# Altium PCB BM Dev Cells.PcbDoc
Units mil, origin at the board's own origin, x right, y up, seen from the top; angles counter-clockwise.
Board outline 3719.4 x 3489.61 mil, 2 copper layers (TOP Copper, BOT Copper), stack 60.8 mil thick; 26 components, 10 nets, 69 pads, 6 vias.
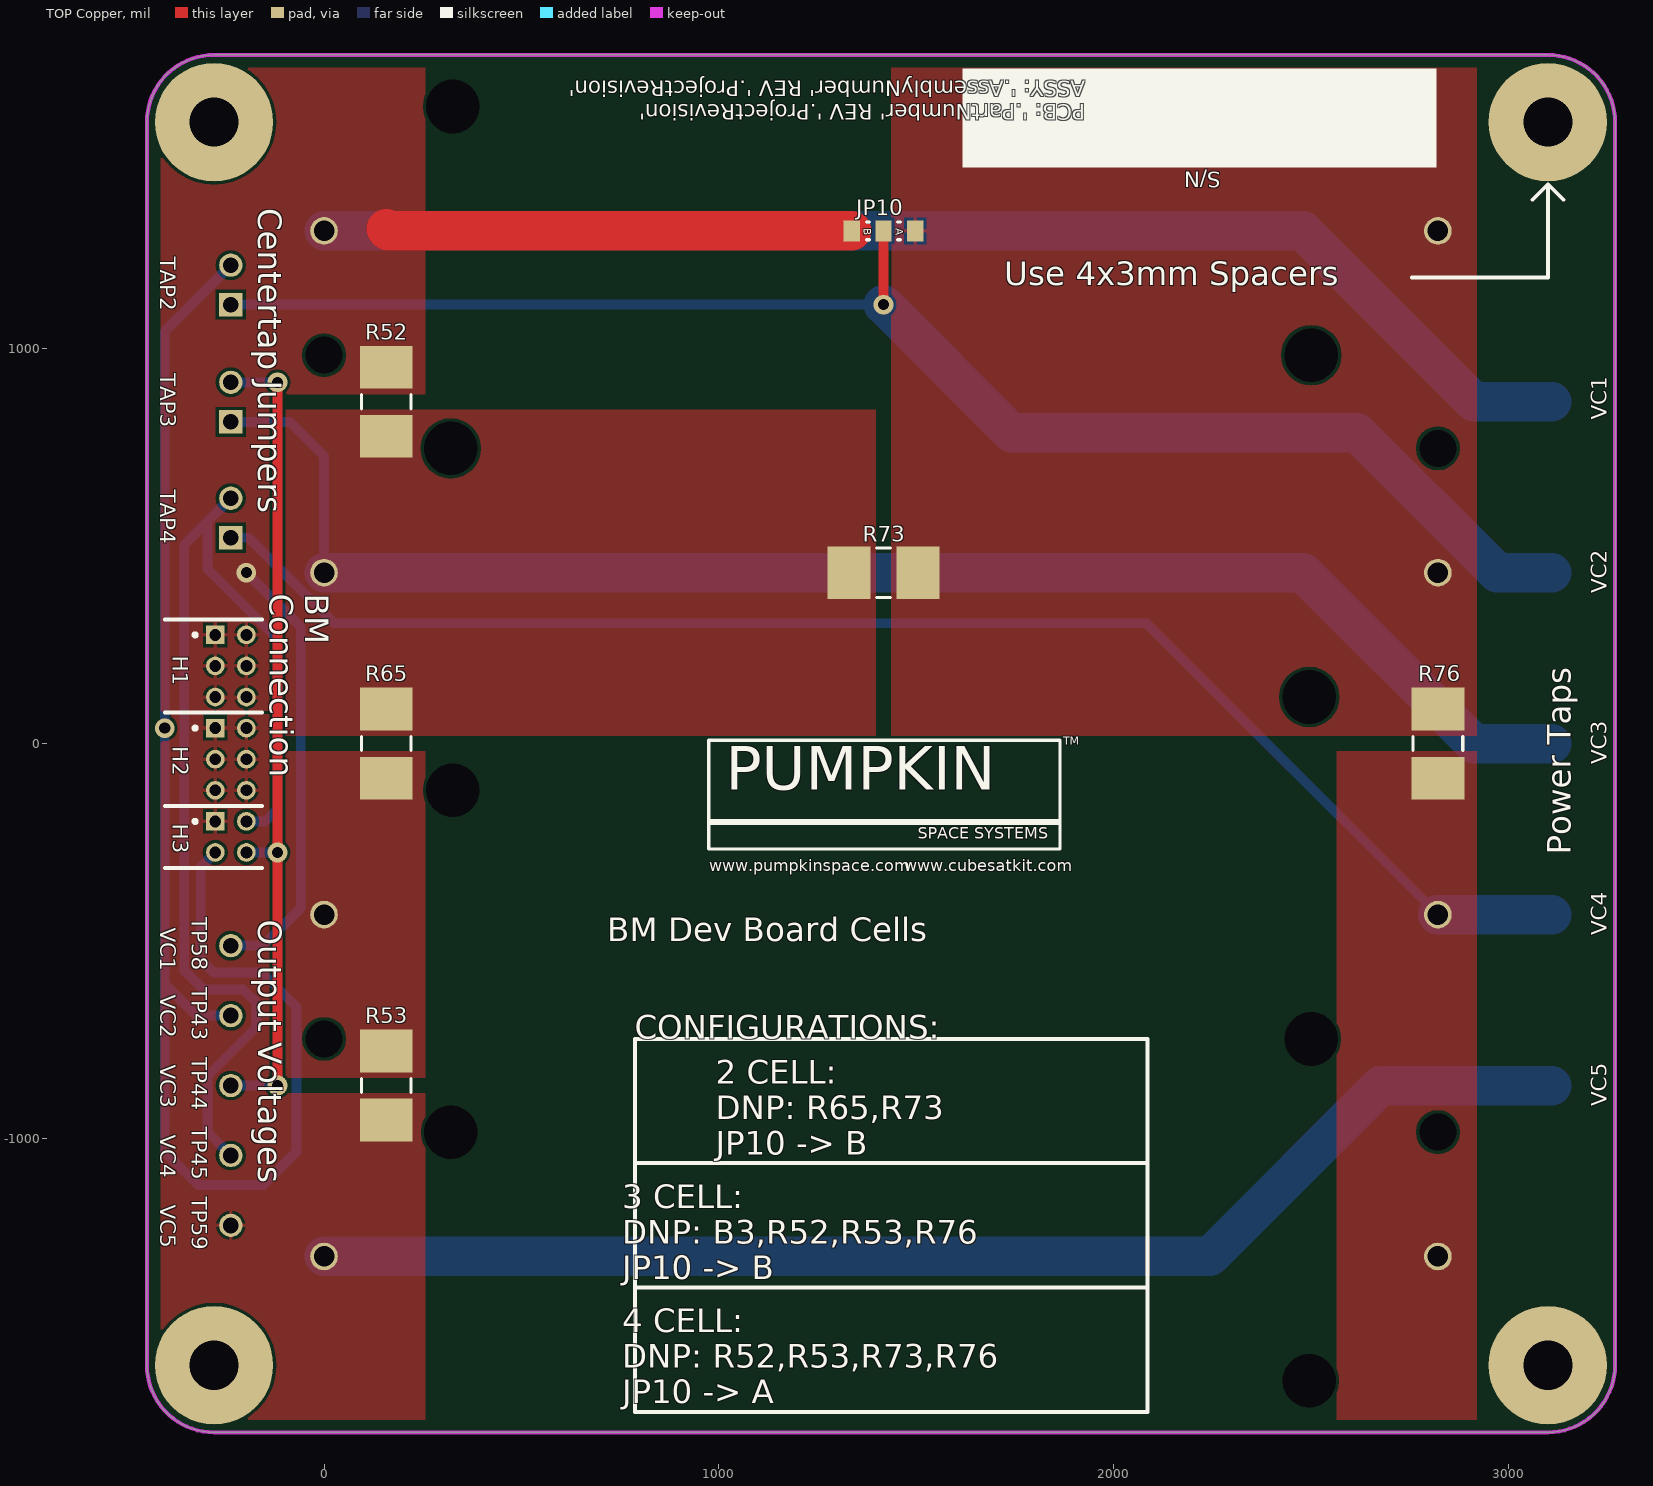
[diagram p0: TOP Copper view]
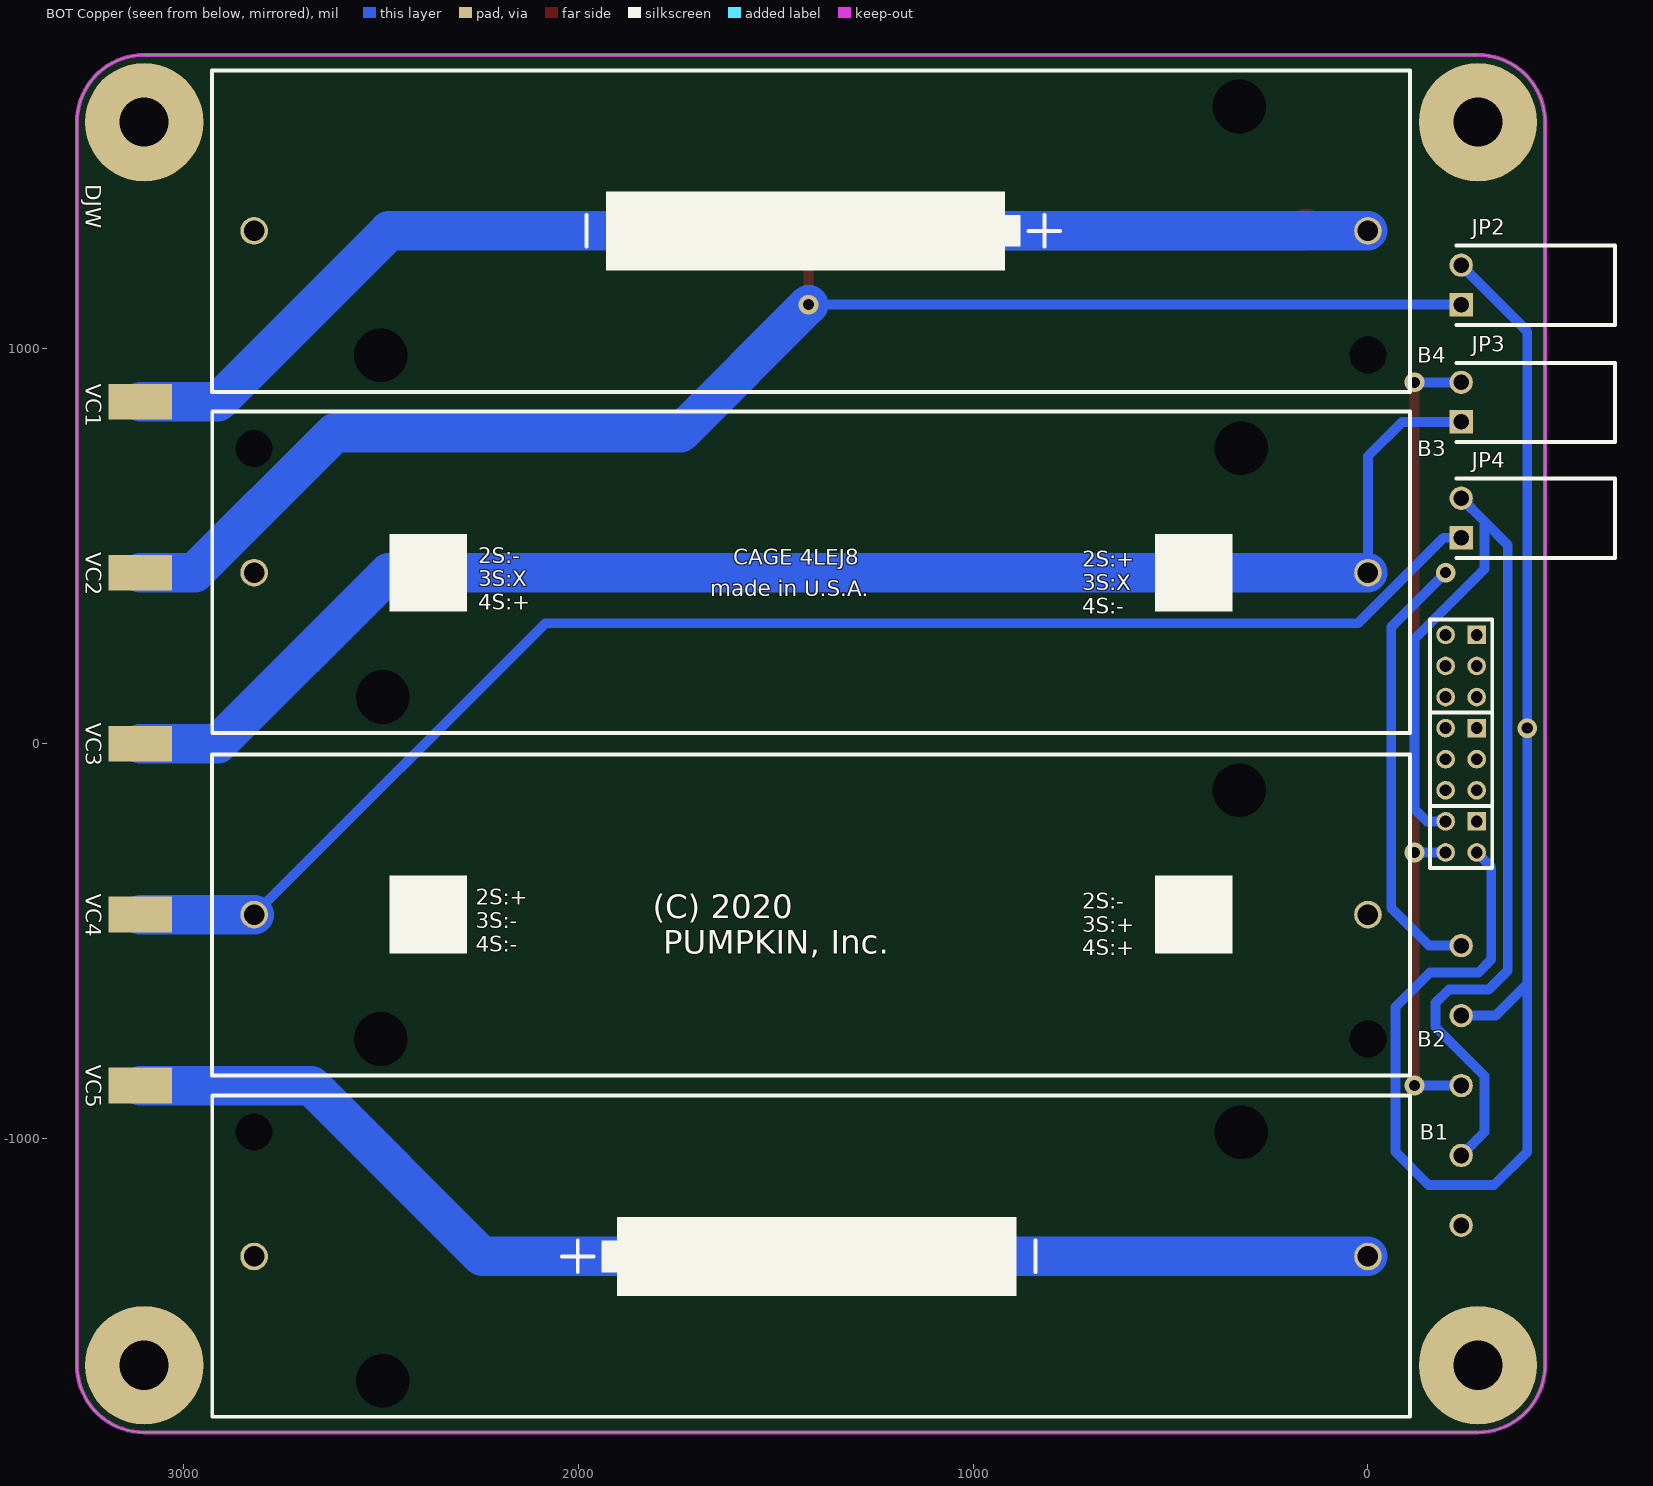
[diagram p1: BOT Copper view, seen from below]
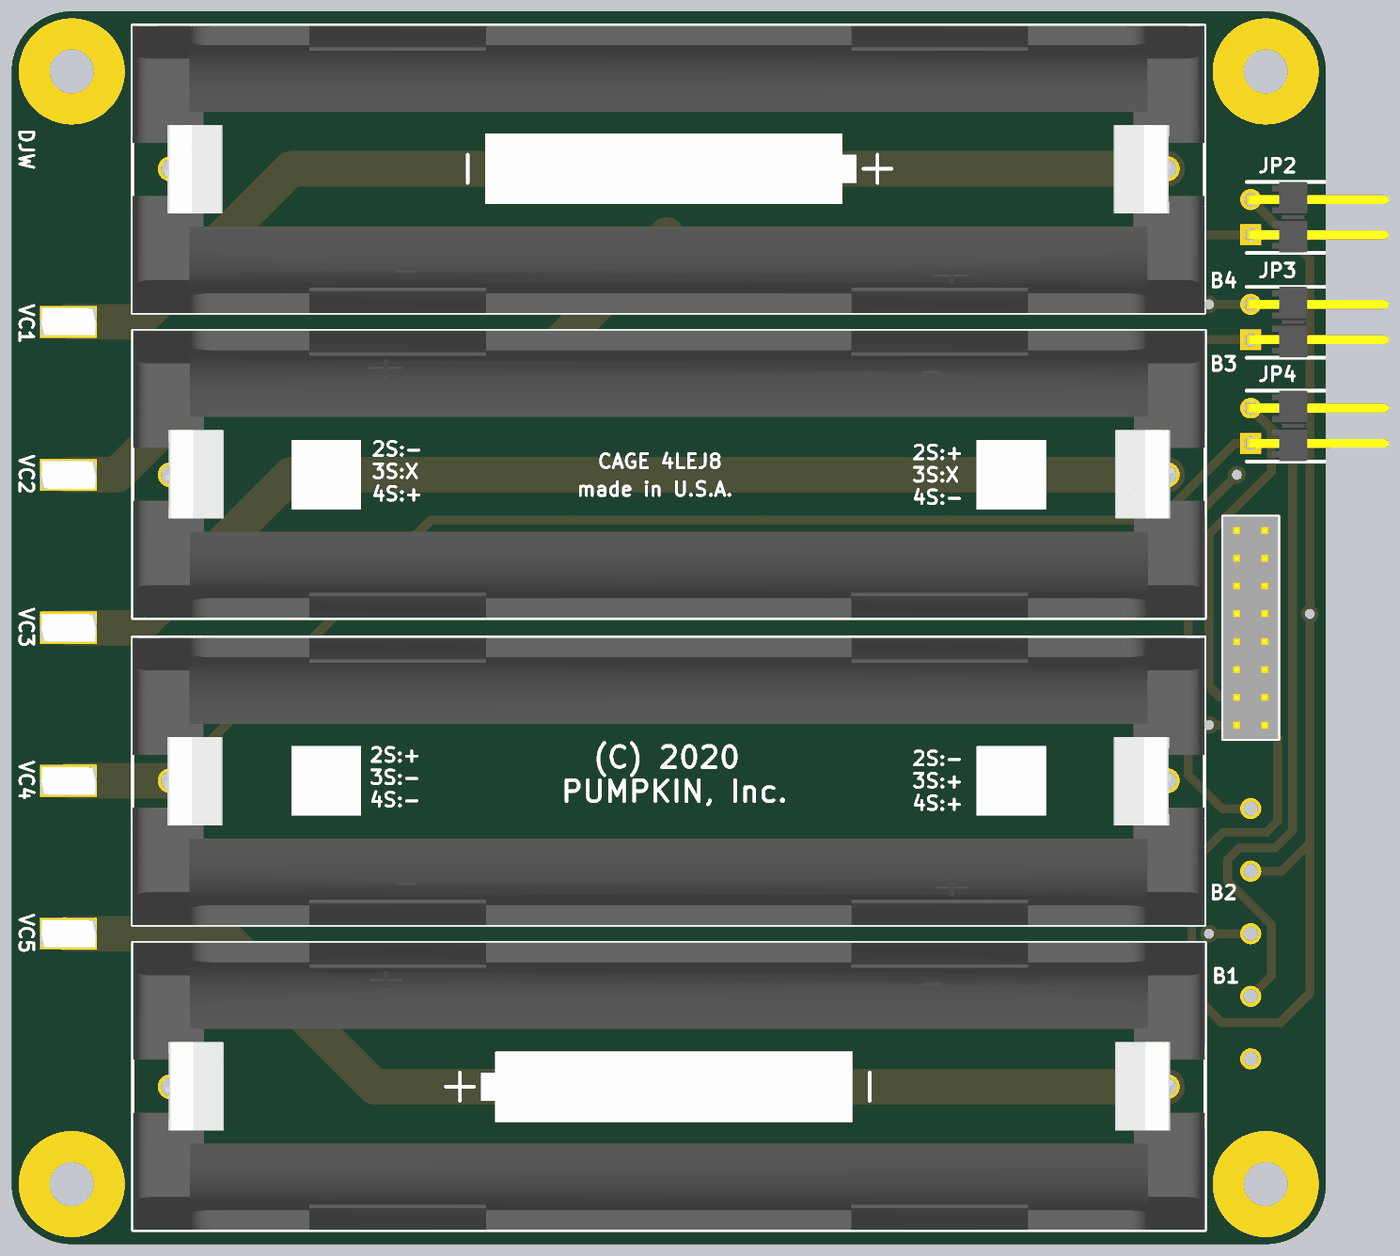
[diagram p2: 3D render of the assembled board from below, using the file's embedded part models]

## Layer stack, top to bottom
Top Solder: solder mask 0.4, Solder Resist, Dk 3.5
TOP Copper: signal copper 1.4
Dielectric 3: prepreg 58, Dk 4.2
BOT Copper: signal copper 1.4
Bottom Solder: solder mask 0.4, Solder Resist, Dk 3.5

## Board outline
-448.7,-1574.8 -448.7,1574.8 cw(c-278.7,1574.8) -278.7,1744.8 3100.7,1744.8 cw(c3100.7,1574.8) 3270.7,1574.8 3270.7,-1574.8 cw(c3100.7,-1574.8) 3100.7,-1744.8 -278.7,-1744.8 cw(c-278.7,-1574.8)

## Design rules (kind name [scope] priority, off if disabled: settings)
Clearance Clearance_1 [HasFootprint('Spark_Gap') vs inPolygon] p1: gap=8 ignorepadtopadclearanceinfootprint=FALSE except(0: Arc-Hole Track-Hole SMDPad-Hole THPad-Hole Via-Hole Fill-Hole Poly-Hole Region-Hole Text-Hole)
Clearance Clearance_3 [HasFootprint('Spark_Gap')] p2: gap=6 ignorepadtopadclearanceinfootprint=FALSE except(0: Arc-Hole Track-Hole SMDPad-Hole THPad-Hole Via-Hole Fill-Hole Poly-Hole Region-Hole Text-Hole)
Clearance Clearance_2 [InNet('BAT_POS')   and not      HasFootprint('Spark_Gap')] p3: gap=8 ignorepadtopadclearanceinfootprint=FALSE except(0: Arc-Hole Track-Hole SMDPad-Hole THPad-Hole Via-Hole Fill-Hole Poly-Hole Region-Hole Text-Hole)
Clearance Polygon_Clearence [All vs OnLayer('Keep-Out Layer')] p4: gap=10 ignorepadtopadclearanceinfootprint=FALSE except(0: Arc-Hole Track-Hole SMDPad-Hole THPad-Hole Via-Hole Fill-Hole Poly-Hole Region-Hole Text-Hole)
Clearance [All] p5: gap=8 ignorepadtopadclearanceinfootprint=FALSE except(0: Arc-Hole Track-Hole SMDPad-Hole THPad-Hole Via-Hole Fill-Hole Poly-Hole Region-Hole Text-Hole)
ComponentClearance ComponentClearance_MTMM [HasFootprint('MTMM-103-03-S-D-243') vs HasFootprint('MTMM-102-02-S-D-196')] p1: gap=0 collisioncheckmode=3 verticalgap=10 showdistances=FALSE
ComponentClearance [All] p2: gap=10 collisioncheckmode=3 verticalgap=1.97 showdistances=FALSE
HoleSize [All] p1: absolutevalues=TRUE maxlimit=314.96 minlimit=1 maxpercent=80.000 minpercent=20.000
MinimumSolderMaskSliver [All] p1: minsoldermaskwidth=6
PolygonConnect PolygonConnect_1 [(InPadClass('Power'))or isVia   or HasFootprint('Spark_Gap')] p1: connectstyle=Direct reliefconductorwidth=10 reliefentries=4 polygonreliefangle="90 Angle" airgapwidth=10
PolygonConnect [All] p2: connectstyle=Relief reliefconductorwidth=10 reliefentries=4 polygonreliefangle="90 Angle" airgapwidth=7.09
RoutingVias [All] p1: holewidth=7.87 width=19.68 viastyle="Through Hole" minholewidth=5 minwidth=15.75 maxholewidth=236.22 maxwidth=314.96
SilkToSilkClearance [All] p1: silktosilkclearance=0
SilkToSolderMaskClearance [IsPad] p1: minsilkscreentomaskgap=0 clearancetoexposedcopper=TRUE
SolderMaskExpansion [All] p1: expansion=0 istentingtop=FALSE
Width [All] p1: maxlimit=100 minlimit=8 preferedwidth=10 minimp=50.000000 maximp=50.000000 favimp=50.000000
25 further rules are at their usual default settings.

## Components (designator, comment, footprint, x,y, rotation, side; value= is the part's Value field where it differs from the comment)
B1 "1043" 1043 2822,-1299.21 r270 bottom
B2 "1043" "1043 - non-polar" 0,-433.07 r90 bottom
B3 "1043" "1043 - non-polar" 2822,433.07 r270 bottom
B4 "1043" 1043 0,1299.21 r90 bottom
H1 "MTMM-103-03-S-D-243" MTMM-103-03-S-D-243 -236.22,196.85 r0 top
H2 "MTMM-103-03-S-D-243" MTMM-103-03-S-D-243 -236.22,-39.37 r0 top
H3 "MTMM-102-02-S-D-196" MTMM-102-02-S-D-196 -236.22,-236.22 r0 top
JP2 "TSW-102-08-L-S-RA" HDR1X2HTH -236.22,1112.2 r90 bottom
JP3 "TSW-102-08-L-S-RA" HDR1X2HTH -236.22,815.35 r90 bottom
JP4 "TSW-102-08-L-S-RA" HDR1X2HTH -236.22,521.65 r90 bottom
JP10 "Jumper" "0805 RES 2 way jumper" 1457.68,1299.21 r180 top
R52 "0R" "2512 RES" 157.48,866.14 r270 top
R53 "0R" "2512 RES" 157.48,-866.14 r90 top
R65 "0R" "2512 RES" 157.48,0 r90 top
R73 "0R" "2512 RES" 1417.32,433.07 r180 top
R76 "0R" "2512 RES" 2822,0 r90 top
TP43 "Testpoint" Testpoint -236.22,-688.98 r90 top
TP44 "Testpoint" Testpoint -236.22,-866.14 r90 top
TP45 "Testpoint" Testpoint -236.22,-1043.31 r90 top
TP58 "Testpoint" Testpoint -236.22,-511.81 r90 top
TP59 "Testpoint" Testpoint -236.22,-1220.47 r90 top
VC1 "Hook" Hook 3110.24,866.14 r344 bottom
VC2 "Hook" Hook 3110.24,433.07 r344 bottom
VC3 "Hook" Hook 3110.24,0 r344 bottom
VC4 "Hook" Hook 3110.24,-433.07 r344 bottom
VC5 "Hook" Hook 3110.24,-866.14 r344 bottom

## Footprints (in the part's own frame and the unit in brackets; to place one, negate y for a bottom-side part, rotate by r counter-clockwise, add the part's x,y. Pads: shape width x height; smd on the part's side, far side on the other; paste and mask are expansions set on the pad)
"0805 RES 2 way jumper" [mm] "Chip Resistor, 2-Leads, Body 2.05x1.25mm, IPC Medium Density"
  rect 1.05x1.35 smd: 1(-1.025,0) 2(1.025,0) 3(3.075,0)
  silkscreen extent -0.07,-0.58 2.13,0.58
1043 [mil]
  round 70 hole 52: 1(0,0) 2(0,2822)
  round 39.37 hole 94 unplated: NC(-315,0)
  round 39.37 hole 136 unplated: NC(-315,2501) NC(315,326)
  silkscreen extent -408,-106 406,2929, body extent -408,-105 405,2929, height 587
"1043 - non-polar" [mil]
  round 70 hole 52: 1(0,0) 2(0,2822)
  round 39.37 hole 94: NC(-315,0)
  round 39.37 hole 136: NC(-315,2501) NC(315,326)
  silkscreen extent -408,-106 406,2929, body extent -408,-105 405,2929, height 587
"2512 RES" [mm] "Chip Resistor, 2-Leads, Body 6.30x3.20mm, IPC Medium Density"
  rect 2.75x3.4 smd paste-2: 1(-2.225,0) 2(2.225,0)
  silkscreen extent -0.45,-1.6 0.45,1.6, body extent -3.25,-1.7 3.25,1.7, height 0.8
HDR1X2HTH [mm] "Connector; Header; 3 Position; Right Angle. Through hole"
  rect 1.5x1.5 hole 1: 1(0,0)
  round 1.5 hole 1: 2(2.54,0)
  silkscreen extent -1.3,-9.9 3.8,0.3, body extent -1.27,-9.91 3.81,0.32, height 3.07
Hook [mm]
  rect 4.1x2.3 smd rot 164 paste-0.3: 1(0,0)
  body extent -2.24,-1.52 2.25,1.53, height 2.3
MTMM-102-02-S-D-196 [mm]
  rect 1.2x1.2 hole 0.762: 1(-1,1)
  round 1.2 hole 0.762: 2(1,1) 3(-1,-1) 4(1,-1)
  silkscreen extent -2.4,0.9 -2.2,1.1, body extent -1.97,-2 1.97,2, height 1.55
MTMM-103-03-S-D-243 [mm]
  rect 1.2x1.2 hole 0.762: 1(-1,2)
  round 1.2 hole 0.762: 2(1,2) 3(-1,0) 4(1,0) 5(-1,-2) 6(1,-2)
  silkscreen extent -2.4,1.9 -2.2,2.1, body extent -1.97,-3 1.97,3, height 1.55
Testpoint [mm]
  round 1.5 hole 1.02: 1(0,0)

## Part data
B1 B2 B3 B4: "Battery 18650 Holder", Supplier Part Number 1=36-1043-ND, Supplier 1=Digi-Key, Supplier 2=Mouser, Supplier Part Number 2=534-1043
H1 H2: "Header 3x2 TH thru-board 2mm", Supplier Part Number 1=MTMM-103-03-G-D-243-ND, Supplier 1=Digi-Key, Supplier 2=Digi-Key, Supplier Part Number 2=MTMM-103-03-G-D-000-ND, System=Connector
H3: "Header 2x2 TH thru-board 2mm", Supplier Part Number 1=MTMM-102-02-S-D-196-ND, Supplier 1=Digi-Key, Supplier 2=Digi-Key, Supplier Part Number 2=MTMM-102-02-G-D-196-ND, System=Connector
JP2 JP3 JP4: "Header 2x1 RA TH", Supplier Part Number 1=SAM1043-02-ND, Supplier 1=Digi-Key, Supplier 2=Digi-Key, Supplier 3=Digi-Key, Supplier 4=Digi-Key, Supplier Part Number 2=SAM10325-ND, Supplier Part Number 3=HTSW-102-08-G-S-RA-ND, Supplier Part Number 4=SAM1039-02-ND
JP10: library part "Jumper 2 way 0805", "Jumper 0805 2 pos", Supplier Part Number 1=P0.0ACT-ND, Supplier 1=Digi-Key, Supplier 2=Digi-Key, Supplier Part Number 2=311-0.0CRCT-ND
R52 R53 R65 R73 R76: library part "Resistor 0R 2512", "Resistor 0R 2512 1W", Supplier Part Number 1=YAG1232CT-ND, Revision="Altium ETH 11-03.2008", Supplier 1=Digi-Key, Supplier 2=Digi-Key, Supplier 3=Digi-Key, Supplier Part Number 2=RMCF2512ZT0R00CT-ND, Supplier Part Number 3=1276-6000-1-ND
TP43 TP44 TP45 TP58 TP59: Supplier Part Number 1=36-5002-ND, Supplier 1=Digi-Key, Supplier 2=Digi-Key, Supplier Part Number 2=36-5001-ND
VC1 VC2 VC3 VC4 VC5: "Testpoint Hook", Manufacturer="Keystone Electronics", Manufacturer Part Number=5016, Supplier Part Number 1=36-5016CT-ND, Supplier 1=Digi-Key, Supplier 1 Pricing="0.60 (NZD)", Supplier 2=Digi-Key, Supplier Part Number 2=36-5018CT-ND

## Free pads (board coordinates)
  round 300 hole 125: ""(-278.7,-1574.8) ""(-278.7,1574.8) ""(3100.7,-1574.8) ""(3100.7,1574.8)

## Via types
v1: diameter 50, hole 28, TOP Copper to BOT Copper, tented both sides, 6 vias

## Nets (pads, with @x,y where several pads share a name; then routed paths per layer and width w, separated by ;. In a path a pad name is that pad's centre, name@x,y a point inside that pad or via, vN(x,y) a via of type N, cw(c..) or ccw(c..) an arc to the next point about the centre after c; other vN are vias at no path point)
CELL_TAP_2: JP2.1 JP10.2 VC2.1 | length 3814.8
  TOP Copper w25: v1(1417.32,1112.2) JP10.2
  BOT Copper w25: JP2.1 v1(1417.32,1112.2)
  BOT Copper w100: v1(1417.32,1112.2) 1742.13,787.4 2618.11,787.4 2972.44,433.07 VC2.1
CELL_TAP_3: B3.2 JP3.1 R52.2 R65.2 R73.2 VC3.1 | length 3857.2
  BOT Copper w25: JP3.1 -87.01,815.35 0,728.35 B3.2
  BOT Copper w100: B3.2 2480.32,433.07 2913.39,0 VC3.1
CELL_TAP_4: B1.1 B2.2 JP4.1 R76.1 VC4.1 | length 3741.9
  BOT Copper w25: JP4.1 -190.94,521.65 25.59,305.12 2083.81,305.12 B2.2
  BOT Copper w100: B2.2 VC4.1
NetB2_1: B2.1 R53.2 R65.1
NetB3_1: B3.1 B4.2 JP10.1 R73.1 R76.2
VC1: B4.1 H1.1 H1.2 H1.3 H1.4 H1.5 H1.6 JP10.3 R52.1 TP58.1 VC1.1 | length 5594.2
  TOP Copper w100: 157.48,1304.21 162.48,1299.21 JP10.3
  BOT Copper w25: TP58.1 -154.28,-511.81 -59.06,-416.59 -59.06,295.28 v1(-196.85,433.07)
  BOT Copper w100: B4.1 2480.32,1299.21 2913.39,866.14 VC1.1
VC5: B1.2 H2.1 H2.2 H2.3 H2.4 H2.5 H2.6 H3.1 R53.1 TP59.1 VC5.1 | length 3289.6
  BOT Copper w100: B1.2 2244.09,-1299.21 2677.17,-866.14 VC5.1
VC_2: H3.3 JP2.2 TP43.1 | length 3866.3
  BOT Copper w25: H3.3 -312.47,-312.47 -312.47,-546.97 -280.12,-579.33 -156.89,-579.33 -69.33,-666.89 -69.33,-1033.9 -153.54,-1118.11 -319.53,-1118.11 -403.54,-1034.1 -403.54,-609.23 ; TP43.1 -323.8,-688.98 -403.54,-609.23 ; JP2.2 -403.54,1044.88 v1(-403.54,39.37) -403.54,-609.23
VC_3: H3.4 JP3.2 TP44.1 | length 2096.5
  TOP Copper w25: v1(-118.11,-866.14) v1(-118.11,-275.59) v1(-118.11,915.35)
  BOT Copper w25: TP44.1 v1(-118.11,-866.14) ; JP3.2 v1(-118.11,915.35) ; H3.4 v1(-118.11,-275.59)
VC_4: H3.2 JP4.2 TP45.1 | length 2817.6
  BOT Copper w25: TP45.1 -295.28,-984.25 -295.28,-841.96 -171.53,-718.22 -171.53,-656.3 -205.1,-622.73 -306.04,-622.73 -354.33,-574.43 -354.33,503.54 -295.28,562.6 ; JP4.2 -295.28,562.6 ; H3.2 -149.61,-196.85 -118.11,-165.35 -118.11,264.98 -295.28,442.15 -295.28,562.6
pads on no net: B1.NC B2.NC B3.NC B4.NC

## Polygon pours and split planes (outlines as drawn)
VC1 on TOP Copper "TOP_COPPER_VC1_P006" (solid, pour order 6): 255.91,885.83 255.91,1712.6 -413.39,1712.6 -413.39,82.37 -137.8,82.37 -137.8,885.83
VC5 on TOP Copper "TOP_COPPER_VC5_P005" (solid, pour order 5): 255.91,-885.83 255.91,-1712.6 -413.39,-1712.6 -413.39,74.8 -137.8,74.8 -137.8,-885.83
CELL_TAP_4 on TOP Copper "TOP_COPPER_CELL_TAP_4_P003" (solid, pour order 3): 2920.43,-1712.6 2566.09,-1712.6 2566.09,-19.69 2920.43,-19.69
NetB3_1 on TOP Copper "TOP_COPPER_NETB3_1_P002" (solid, pour order 2): 2920.43,19.68 1437.01,19.68 1437.01,1712.6 2920.43,1712.6
CELL_TAP_3 on TOP Copper "TOP_COPPER_CELL_TAP_3_P001" (solid, pour order 1): -98.43,846.46 1397.64,846.46 1397.64,19.69 -98.43,19.69
NetB2_1 on TOP Copper "TOP_COPPER_NETB2_1_P000" (solid, pour order 0): -98.43,-19.68 255.91,-19.68 255.91,-846.46 -98.43,-846.46

## Keep-outs
Keep-Out Layer:
  the board outline again, w10

## Other copper
TOP Copper:
  text "Layer 1 (TOP)" at 857.95,2261.2 h196.85
BOT Copper:
  text "Layer 4 (BOTTOM)" at 857.95,2277.2 h196.85

## Silkscreen, mask and mechanical layers (free items; w line width, h text height)
Top Overlay:
  region: 1617.89,1710.24 1617.89,1460.24 2817.89,1460.24 2817.89,1710.24
  lines w8: 974.63,-202.56 1864.63,-202.56 ; 974.63,-194.56 1864.63,-194.56 ; 974.63,-266.56 1864.63,-266.56 1864.63,8.44 974.63,8.44 974.63,-266.56
  lines w10: -403.54,-314.96 -157.48,-314.96 ; -403.54,-157.48 -157.48,-157.48 ; -403.54,78.74 -157.48,78.74 ; -403.54,314.96 -157.48,314.96 ; 787.4,-1377.95 2086.61,-1377.95 ; 787.4,-1062.95 2086.61,-1062.95 ; 2755.91,1181.1 3100.7,1181.1 3100.7,1417.32 ; 3061.33,1377.95 3100.7,1417.32 ; 3140.07,1377.95 3100.7,1417.32 ; 2086.61,-1062.99 2086.61,-1062.95 ; 787.4,-1692.91 787.4,-748.03 2086.61,-748.03 2086.61,-1692.91 787.4,-1692.91
  text "Top Silkscreen" at 828.49,2263.29 h196.85
  text "PCB: '.PartNumber' REV '.ProjectRevision' / ASSY: '.AssemblyNumber' REV '.ProjectRevision'" at 1928.75,1679.61 h39.37 r180
  text "Centertap jumpers must be populated with a jumper or ammeter before connecting Dev Board" at 243.4,1480.33 h60 r270
  text "S/N" at 2271.35,1449.1 h39.37 r180
  text "Centertap Jumpers" at -166.86,1355.98 h60 r270
  text "TAP2" at -415.35,1233.57 h39.37 r270
  text "Use 4x3mm Spacers" at 1723.65,1161.11 h60
  text "TAP3" at -415.35,938.3 h39.37 r270
  text "VC1" at 3250,820.22 h39.37 r90
  text "TAP4" at -415.35,643.02 h39.37 r270
  text "VC2" at 3250,380.59 h39.37 r90
  text "BM / Connection" at -137.8,379.88 h60 r270
  text "TM" at 1873.02,-10.45 h35
  text "VC3" at 3250,-52.48 h39.37 r90
  text "PUMPKIN" at 1017.63,-153.56 h190
  text "SPACE SYSTEMS" at 1504.63,-250.56 h50
  text "Power Taps" at 3158.98,-281.47 h60 r90
  text "www.pumpkinspace.com" at 975.63,-323.56 h30
  text "www.cubesatkit.com" at 1469.63,-323.56 h30
  text "Output Voltages" at -166.86,-446.28 h60 r270
  text "VC1" at -415.35,-465.89 h39.37 r270
  text "VC4" at 3250,-485.55 h39.37 r90
  text "BM Dev Board Cells" at 716.94,-500.88 h60
  text "VC2" at -415.35,-636.5 h39.37 r270
  text "CONFIGURATIONS:" at 787.4,-748.03 h60
  text "VC3" at -415.35,-813.67 h39.37 r270
  text "VC5" at 3250,-918.62 h39.37 r90
  text "VC4" at -415.35,-990.83 h39.37 r270
  text "2 CELL: / DNP: R65,R73 / JP10 -> B" at 992.24,-1041.48 h60
  text "VC5" at -415.35,-1168 h39.37 r270
  text "3 CELL: / DNP: B3,R52,R53,R76 / JP10 -> B" at 756.02,-1356.44 h60
  text "4 CELL: / DNP: R52,R53,R73,R76 / JP10 -> A" at 756.02,-1671.4 h60
Bottom Overlay:
  text "Bottom Silkscreen" at 4200.5,2303.69 h196.85
  text "DJW" at 3248.03,1417.32 h39.37 r90
  text "CAGE 4LEJ8" at 1607.55,452.76 h39.37
  text "made in U.S.A." at 1666.59,374.02 h39.37
  text "2S:- / 3S:X / 4S:+" at 2253.94,339.39 h39.37
  text "2S:+ / 3S:X / 4S:-" at 724.37,329.55 h39.37
  text "2S:+ / 3S:- / 4S:-" at 2259.8,-526.75 h39.37
  text "(C) 2020 /  PUMPKIN, Inc." at 1812.2,-532.05 h60
  text "2S:- / 3S:+ / 4S:+" at 724.37,-536.59 h39.37
Top Paste:
  text "Top Solder Paste" at 866.95,2264.2 h196.85
Bottom Paste:
  text "Bottom Solder Paste" at 843.95,2262.2 h196.85
Top Solder:
  text "Top Soldermask" at 844.95,2051.2 h196.85
Bottom Solder:
  text "Bottom Soldermask" at 4200.5,2067.95 h196.85
  text "Bottom Soldermask" at 838.95,2053.2 h196.85
Mechanical 2:
  text "Mechanical Drawing" at 888.95,2269.2 h196.85
  text "FABRICATION NOTES: / ---------------------------------------------------- / 1.  ALL DIMENSIONS IN INCHES / 2.  SCALE IS 1:1 / 4.  SMOBC BOTH SIDES. COLOR: RED / 5.  SOLDERMASK IS LPI, SEMI-GLOSS FINISH / 6.  SILKSCREEN LEGEND WHITE / 7.  SILKSCREEN TOP AND BOTTOM / 8.  FINAL BOARD THICKNESS = 0.062\" / 9.  FINAL COPPER THICKNESS = 1oz / 10. 2 CIRCUIT LAYERS / 11. MINIMUM SPACING 0.007\" / 12. MINIMUM SMD PITCH IS 0.020\" / 13. SURFACEMOUNT  COMPONENTS TOP AND BOTTOM / 14. DO NOT ADD TOOLING HOLES / 16. NUMBER OF SMD PADS: 18 / 17. NUMBER OF HOLES: '.Hole_Count' / 18. SMALLEST HOLE IS 0.7mm / 19. ENTIRE BOARD TO BE IMMERSION GOLD 2 MICROINCHES /     MINIMUM OVER ELECTROLESS NICKEL 150 MICROINCHES  /     PER IPC-4552" at 3622.05,-511.81 h157.48
Mechanical 3:
  text "'.PartNumber''.ProjectRevision'" at -275.59,2273.62 h196.85
Drill Drawing:
  circle w10: c3691.46,-1575.54 r33.33
  lines w10: 3658.13,-2192.2 3674.79,-2192.2 3674.79,-2208.87 3708.13,-2208.87 3708.13,-2192.2 3724.79,-2192.2 3724.79,-2158.87 3708.13,-2158.87 3708.13,-2142.2 3674.79,-2142.2 3674.79,-2158.87 3658.13,-2158.87 3658.13,-2192.2 ; 3658.13,-1992.2 3724.79,-1992.2 3691.46,-2058.87 3658.13,-1992.2 ; 3658.13,-1758.87 3691.46,-1742.2 3724.79,-1758.87 3708.13,-1725.54 3724.79,-1692.2 3691.46,-1708.87 3658.13,-1692.2 3674.79,-1725.54 3658.13,-1758.87 ; 3658.13,-1442.2 3674.79,-1442.2 3691.46,-1458.87 3708.13,-1442.2 3724.79,-1442.2 3708.13,-1425.54 3724.79,-1408.87 3708.13,-1408.87 3691.46,-1392.2 3674.79,-1408.87 3658.13,-1408.87 3674.79,-1425.54 3658.13,-1442.2 ; 3658.13,-1158.87 3724.79,-1158.87 3724.79,-1092.2 3658.13,-1092.2 3658.13,-1158.87 ; 3658.13,-1008.87 3658.13,-992.2 3674.79,-975.54 3658.13,-958.87 3658.13,-942.2 3674.79,-942.2 3691.46,-958.87 3708.13,-942.2 3724.79,-942.2 3724.79,-958.87 3708.13,-975.54 3724.79,-992.2 3724.79,-1008.87 3708.13,-1008.87 3691.46,-992.2 3674.79,-1008.87 3658.13,-1008.87 ; 3658.13,-825.54 3691.46,-858.87 3724.79,-825.54 3691.46,-792.2 3658.13,-825.54
  lines w15: 3598.33,-2253.87 9202.82,-2253.87 ; 3598.33,-753.87 9202.82,-753.87 ; 4149.21,-2403.87 4149.21,-603.87 ; 4689.07,-2403.87 4689.07,-603.87 ; 5838.73,-2403.87 5838.73,-603.87 ; 6344.61,-2403.87 6344.61,-603.87 ; 7078.41,-2403.87 7078.41,-603.87 ; 7944.17,-2403.87 7944.17,-603.87 ; 3598.33,-2403.87 9202.82,-2403.87 9202.82,-603.87 3598.33,-603.87 3598.33,-2403.87
  text "Drill Drawing" at 843.95,2046.2 h196.85
  text "Symbol" at 3688.33,-708.87 h72
  text "Count" at 4194.21,-708.87 h72
  text "Hole Size" at 4734.07,-708.87 h72
  text "Plated" at 5883.73,-708.87 h72
  text "Hole Type" at 6389.61,-708.87 h72
  text "Hole Length" at 7123.41,-708.87 h72
  text "Rout Path Length" at 7989.17,-708.87 h72
  text "6" at 4194.21,-858.87 h60
  text "28.00mil (0.711mm)" at 4734.07,-858.87 h60
  text "PTH" at 5883.73,-858.87 h60
  text "Round" at 6389.61,-858.87 h60
  text "-" at 7123.41,-858.87 h60
  text "-" at 7989.17,-858.87 h60
  text "16" at 4194.21,-1008.87 h60
  text "30.00mil (0.762mm)" at 4734.07,-1008.87 h60
  text "PTH" at 5883.73,-1008.87 h60
  text "Round" at 6389.61,-1008.87 h60
  text "-" at 7123.41,-1008.87 h60
  text "-" at 7989.17,-1008.87 h60
  text "6" at 4194.21,-1158.87 h60
  text "39.37mil (1.000mm)" at 4734.07,-1158.87 h60
  text "PTH" at 5883.73,-1158.87 h60
  text "Round" at 6389.61,-1158.87 h60
  text "-" at 7123.41,-1158.87 h60
  text "-" at 7989.17,-1158.87 h60
  text "5" at 4194.21,-1308.87 h60
  text "40.16mil (1.020mm)" at 4734.07,-1308.87 h60
  text "PTH" at 5883.73,-1308.87 h60
  text "Round" at 6389.61,-1308.87 h60
  text "-" at 7123.41,-1308.87 h60
  text "-" at 7989.17,-1308.87 h60
  text "P" at 3659.24,-1318.86 h66.67
  text "8" at 4194.21,-1458.87 h60
  text "52.00mil (1.321mm)" at 4734.07,-1458.87 h60
  text "PTH" at 5883.73,-1458.87 h60
  text "Round" at 6389.61,-1458.87 h60
  text "-" at 7123.41,-1458.87 h60
  text "-" at 7989.17,-1458.87 h60
  text "2" at 4194.21,-1608.87 h60
  text "94.00mil (2.388mm)" at 4734.07,-1608.87 h60
  text "NPTH" at 5883.73,-1608.87 h60
  text "Round" at 6389.61,-1608.87 h60
  text "-" at 7123.41,-1608.87 h60
  text "-" at 7989.17,-1608.87 h60
  text "2" at 4194.21,-1758.87 h60
  text "94.00mil (2.388mm)" at 4734.07,-1758.87 h60
  text "PTH" at 5883.73,-1758.87 h60
  text "Round" at 6389.61,-1758.87 h60
  text "-" at 7123.41,-1758.87 h60
  text "-" at 7989.17,-1758.87 h60
  text "4" at 4194.21,-1908.87 h60
  text "125.00mil (3.175mm)" at 4734.07,-1908.87 h60
  text "PTH" at 5883.73,-1908.87 h60
  text "Round" at 6389.61,-1908.87 h60
  text "-" at 7123.41,-1908.87 h60
  text "-" at 7989.17,-1908.87 h60
  text "T" at 3659.24,-1918.86 h66.67
  text "4" at 4194.21,-2058.87 h60
  text "136.00mil (3.454mm)" at 4734.07,-2058.87 h60
  text "NPTH" at 5883.73,-2058.87 h60
  text "Round" at 6389.61,-2058.87 h60
  text "-" at 7123.41,-2058.87 h60
  text "-" at 7989.17,-2058.87 h60
  text "4" at 4194.21,-2208.87 h60
  text "136.00mil (3.454mm)" at 4734.07,-2208.87 h60
  text "PTH" at 5883.73,-2208.87 h60
  text "Round" at 6389.61,-2208.87 h60
  text "-" at 7123.41,-2208.87 h60
  text "-" at 7989.17,-2208.87 h60
  text "57 Total" at 4194.21,-2358.87 h60

## Dimensions
-278.7,1744.8 to -278.7,-1744.8 on Mechanical 2
-448.7,-1574.8 to 3270.7,-1574.8 on Mechanical 2

## Text inside footprints (layer, text, board x,y; h text height)
JP10: Top Overlay "A" at 1448.32,1306.21 h19.68 r270; Top Overlay "B" at 1367.32,1306.21 h19.68 r270